# EAGLE board shield-l293d-robotitos-fai (EAGLE 5.12)
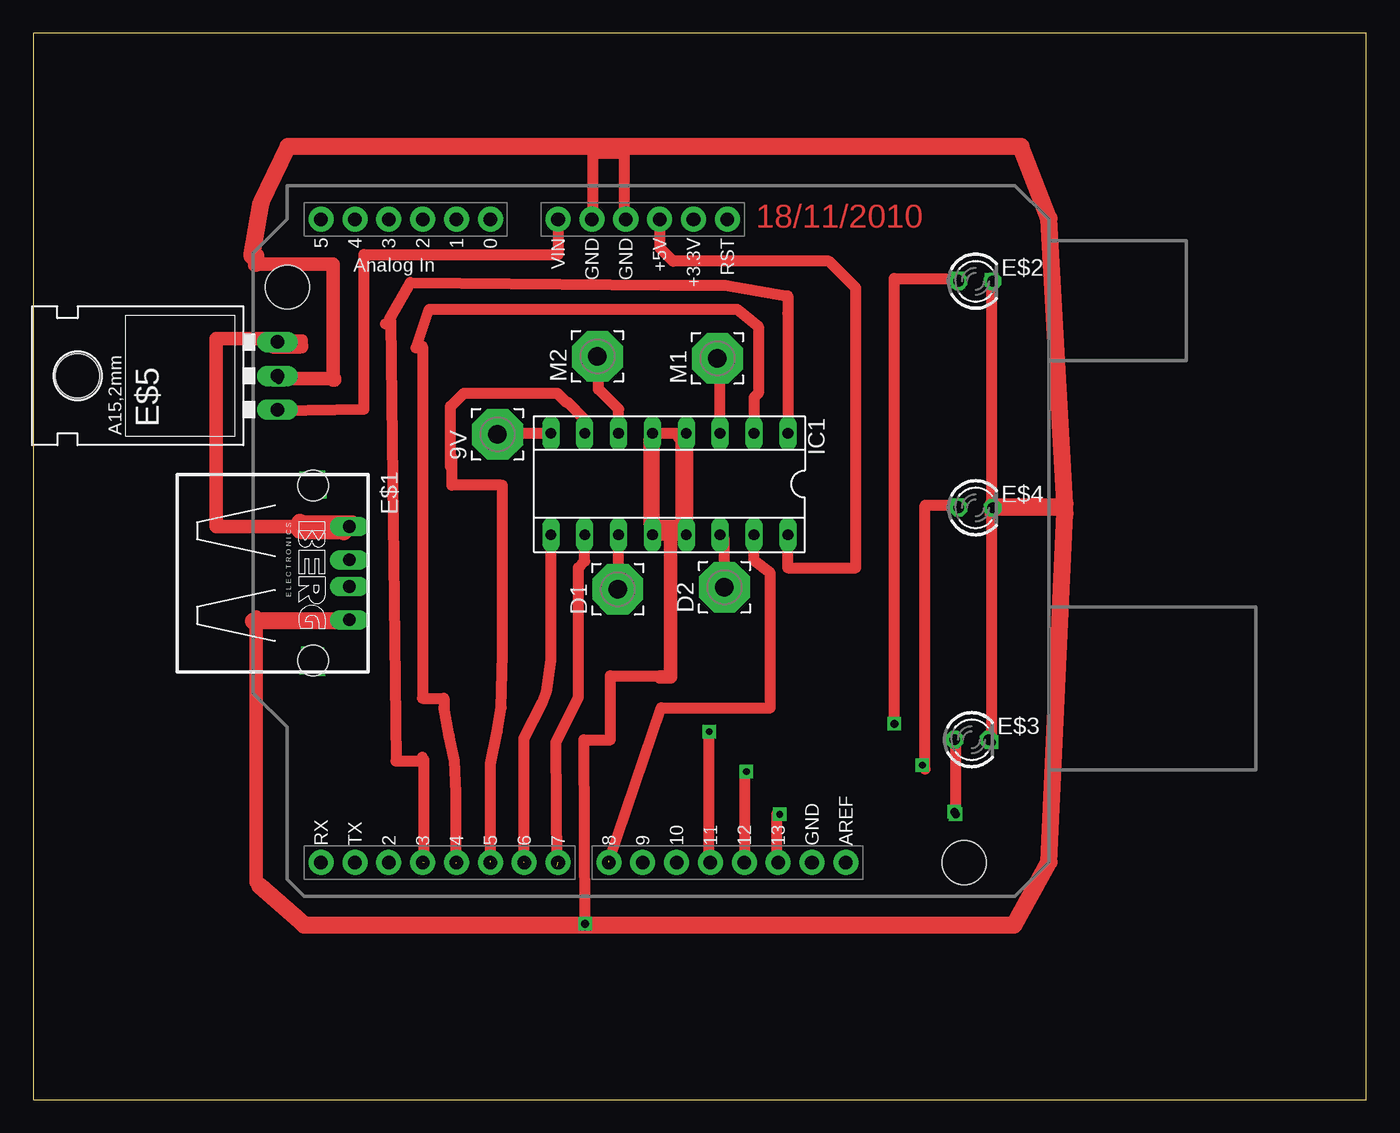
[diagram p0: board, top side]

Size 100 x 80 mm. Coordinates in mm from the lower left corner, seen from the top.
Outline: 0,0 100,0 100,80 0,80 0,0
Copper layers (1*16): Top 0.035mm / dielectric 1.5mm / Bottom 0.035mm
Design rules "default": minimum track width 10mil, minimum drill 24mil, track to track 8mil, track to pad 8mil, pad to pad 8mil, via to via 8mil, smd to smd 8mil, copper to edge 40mil, drill to drill 8mil, minimum pad ring 10mil, minimum via ring 8mil, stop-mask expansion 4mil, vias tented up to drill 0mil, thermal gap 10mil

## Footprints (pad centres in the part's own frame; a part is rotated, then mirrored left to right if it is on the bottom)
3,81/1,4 = drill 1.397 pad 3.81 octagon: 1 0,0
PN87520 = drill 0.95 long: 1 -3.5,2.71; 2 -1,2.71; 3 1,2.71; 4 3.5,2.71 | hole 2.3: -6.57,0; 6.57,0
LED3MM = drill 0.813 octagon: A -1.27,0; K 1.27,0
78XXL = drill 1.016 long: GND 0,-3.81; IN -2.54,-3.81; OUT 2.54,-3.81 | hole 3.302: 0,11.176
SOCKET-16 = drill 0.813 long: 1 -8.89,-3.81; 2 -6.35,-3.81; 3 -3.81,-3.81; 4 -1.27,-3.81; 5 1.27,-3.81; 6 3.81,-3.81; 7 6.35,-3.81; 8 8.89,-3.81; 9 8.89,3.81; 10 6.35,3.81; 11 3.81,3.81; 12 1.27,3.81; 13 -1.27,3.81; 14 -3.81,3.81; 15 -6.35,3.81; 16 -8.89,3.81
DUEMILANOVE_SHIELD = drill 1.016 pad 1.88 round: 3.3V 50.8,26.67; 5V 50.8,29.21; A0 50.8,41.91; A1 50.8,44.45; A2 50.8,46.99; A3 50.8,49.53; A4 50.8,52.07; A5 50.8,54.61; AREF 2.54,15.24; D2 2.54,49.53; D3 2.54,46.99; D4 2.54,44.45; D5 2.54,41.91; D6 2.54,39.37; D7 2.54,36.83; D8 2.54,33.02; D9 2.54,30.48; D10 2.54,27.94; D11 2.54,25.4; D12 2.54,22.86; D13 2.54,20.32; GND@0 50.8,31.75; GND@1 50.8,34.29; GND@2 2.54,17.78; RES 50.8,24.13; RX 2.54,54.61; TX 2.54,52.07; VIN 50.8,36.83 | hole 3.302: 45.72,57.15; 2.54,6.35

## Placement (x,y rotation side)
9V  [3,81/1,4]  34.82,49.91 90 top
D1  [3,81/1,4]  43.85,38.29 90 top
D2  [3,81/1,4]  51.85,38.44 90 top
E$1  [PN87520]  21,39.5 270 top
E$2  [LED3MM]  70.7,61.4 0 top
E$3  [LED3MM]  70.4,27 0 top
E$4  [LED3MM]  70.7,44.4 0 top
E$5  [78XXL]  14.5,54.3 90 top
IC1  [SOCKET-16]  47.72,46.18 180 top
M1  [3,81/1,4]  51.32,55.61 90 top
M2  [3,81/1,4]  42.32,55.76 90 top
U1  ARDUINO_SHIELDLABEL  [DUEMILANOVE_SHIELD]  76.2,15.24 90 top

## Library data of the parts
9V D1 D2 M1 M2 = wirepad
E$1 = con-berg
E$2-E$4 = led
E$5 = v-reg
IC1 = ic-package
U1 = SparkFun

## Nets
N$1: 9V.1 IC1.8
N$2: IC1.4 IC1.5
N$3: IC1.15 U1.D8
N$4: IC1.16 U1.5V
N$5: D2.1 IC1.14
N$6: D1.1 IC1.11
N$7: IC1.3 M1.1
N$8: IC1.6 M2.1
N$9: IC1.10 U1.D7
N$10: IC1.9 U1.D6
N$11: U1.D5
N$12: IC1.2
N$13: IC1.1
N$14: U1.D11
N$15: U1.D12
N$16: U1.D13
N$18: IC1.12 IC1.13
N$22: U1.GND@0
S$10: IC1.7
S$17: U1.D3
S$20: U1.D4

## Tracks (layer width: path | path; a pad name or v marks a point on that pad's centre or on a via)
N$1
  Top 0.813: IC1.8 34.9,49.99 9V.1
N$2
  Top 0.813: IC1.5 IC1.4
N$3  (1 unrouted)
  Top 0.813: IC1.15 54.07,40.43 55.3,39.5 55.3,29.4 47.1,29.4 43.2,17.92
N$4
  Top 0.813: IC1.16 56.61,39.9 61.7,39.9 61.7,60.9 59.7,62.9 48,62.9 47,63.9 U1.5V
N$5
  Top 0.813: D2.1 51.85,42.05 IC1.14
N$6
  Top 0.813: IC1.11 43.91,38.35 D1.1
N$7
  Top 0.813: IC1.3 51.53,55.4 M1.1
N$8
  Top 0.813: IC1.6 43.91,51.79 42.4,53.3 42.4,55.68 M2.1
N$9  (1 unrouted)
  Top 0.813: IC1.10 41.37,40.37 40.9,39.9 40.9,30.2 39.2,26.8 39.3,17.5
N$10  (1 unrouted)
  Top 0.813: IC1.9 38.83,32.97 38.5,30.6 38.2,29.8 36.8,27.1 36.8,17.82
N$11  (1 unrouted)
  Top 0.813: 35.2,46.1 35.2,33.4 35.1,29.4 34.8,27.6 34.3,25.2 34.3,17.9
N$12
  Top 0.813: IC1.2 54.07,52.67 54.4,53 54.4,58 52.8,59.3 29.7,59.3 28.7,56.4
N$13
  Top 0.813: IC1.1 56.61,58.99 56.6,60.3 51.9,61.1 47.1,61.1 28.3,61.3 26.7,58.5
N$18
  Top 0.813: IC1.12 IC1.13
N$19
  Top 0.813: 71.8,43.9 71.8,44.7 77.4,44.7 | 72.2,44.2 77.4,44.2 77.4,44
  Top 1.27: 19.4,71.5 74.1,71.5 76.2,66.1 77.4,44.7 77.4,44 76.2,17.8 73.6,13.1 20.3,13.1 17,16
S$1  (via drill 0.6)
  other vias: 18.4,54
S$2  (via drill 0.6, 0.6 pad 0.3)
  Top 0.813: v69.4,61.6 64.6,61.6 v64.6,28.2
S$3  (via drill 0.6 pad 0.3)
  Top 0.813: v69.4,44.6 66.9,44.6 66.9,24.8
S$4  (via drill 0.6)
  Top 0.813: v69.2,21.4 69.2,27
S$5  (via drill 0.6, 0.6 pad 0.3)
  Top 0.813: v71.9,26.8 v71.9,61.5
S$6  (via drill 0.6)
  Top 0.813: v44.3,66 44.3,71 42,71 42,66
S$7
  Top 1.016: 47,31.7 47.8,31.7 47.8,42.7
S$8  (via drill 0.6)
  Top 0.813: 47,31.8 43.3,31.8 43.3,27 41.3,27 v41.4,13.2
S$9
  Top 0.813: 46.6,43.1 46.6,50 | 46.6,43.1 46.6,42.6 49.1,42.6 49.1,50 48.4,50 48.4,49.7 48.6,49.7 48.6,43.1 46.6,43.1 | 46.6,43.1 46.2,43.1 46.2,49.6
S$10
  Top 0.813: IC1.7 41.37,51.03 40.1,52.3 40,52.3 39.3,53 32.3,53 31.3,52 31.3,47.5
S$11  (via drill 0.6 pad 1.02)
  other vias: 20.7,33.3
S$12  (via drill 0.6 pad 1.02)
  other vias: 21.3,33.4
S$13
  Top 1.27: 23.8,35.9 16.5,35.9
S$14  (via drill 0.6 pad 1.02)
  other vias: 21.4,32.9
S$15
  Top 1.27: 23.9,43.2 20,43.2 | 20,43.2 20,43.3 | 20,43.2 20,42.7 23.3,42.7 23.3,42.6
S$16  (via drill 0.6 pad 1.02)
  other vias: 21.4,32.3
S$17  (1 unrouted)
  Top 0.813: 29.3,17.75 29.3,25.5
S$18
  Top 1.27: 19.1,71.5 17.1,67.3 16.4,63.4
S$19
  Top 0.813: 35.1,46.1 31.4,46.1 31.4,48.2
S$20  (1 unrouted)
  Top 0.813: 28.8,56.5 29.2,56.5 29.2,30.1 30.8,30.1 30.8,29.4 31.2,27.3 31.6,25.4 31.7,23 31.7,17.76
S$21
  Top 0.813: 18.4,51.7 24.8,51.8 24.8,63.4 39.4,63.4 39.4,66.3
S$22
  Top 0.813: 13.8,55 13.8,54.5
S$23
  Top 0.813: 26.4,58.2 26.8,58.5 27.2,25.4 29.2,25.4 29.2,25.7
S$24  (via drill 0.6 pad 1.02)
  other vias: 20.6,32.5
S$25  (via drill 0.6 pad 1.02)
  other vias: 20.6,33.5
S$26  (via drill 0.6 pad 1.02)
  other vias: 20.5,46.6
S$27  (via drill 0.6 pad 1.02)
  other vias: 20.6,45.8
S$28  (via drill 0.6 pad 1.02)
  other vias: 21,45.5
S$29  (via drill 0.6 pad 1.02)
  other vias: 21.5,45.6
S$30  (via drill 0.6 pad 1.02)
  other vias: 21.5,45.9
S$31  (via drill 0.6 pad 1.02)
  other vias: 21.4,46.7
S$32  (via drill 0.6 pad 1.02)
  other vias: 21.1,46.7
S$33  (via drill 0.6 pad 1.02)
  other vias: 20.9,46.2
S$34  (via drill 0.6 pad 1.02)
  other vias: 21.1,32.5
S$35  (via drill 0.6 pad 1.02)
  other vias: 21,33.3
S$36  (via drill 0.6 pad 1.02)
  other vias: 20.5,32.4
S$37  (via drill 0.5 pad 1.02)
  Top 0.813: 50.7,17.7 v50.7,27.6 50.7,27.7
S$38  (via drill 0.6)
  Top 0.813: v53.4,17.9 53.4,24.7
S$39  (via drill 0.6)
  Top 0.813: v55.8,17.9 55.8,21.5
S$40  (via drill 0.5 pad 1.02)
  other vias: 53.5,24.6
S$41  (via drill 0.5 pad 1.02)
  other vias: 66.7,25.1
S$42  (via drill 0.5 pad 1.02)
  other vias: 56,21.4
S$43
  Top 0: 16.4,63.3 16.3,63.3
  Top 1.27: 16.4,63.3 16.7,63.3
S$44
  Top 1.016: 18.1,54.1 22.6,54.1 22.6,54 22.5,54 22.5,62.7 16.7,62.7 16.7,62.6 16.6,62.6 16.6,63.7
S$45
  Top 1.016: 16.8,16.3 16.7,16.3 16.7,36.2
S$46
  Top 0.813: 18.2,57 20.2,57 20.2,56.8 20.1,56.8 20.1,56.4 17.9,56.4 17.9,56.7 18.5,56.7 20.2,56.7 20.2,56.4
  Top 1.016: 20.4,43 13.7,43 13.7,57.1 18.5,57.1 18.5,56.7
S$49  (via drill 0.6)
  other vias: 69.4,61.4
S$50  (via drill 0.6)
  other vias: 69.1,21.6
S$51  (via drill 0.6)
  other vias: 18.4,54.5

## Text on the board
Top: 18/11/2010